# Altium PCB Top.PcbDoc
Units mm, origin at the board's own origin, x right, y up, seen from the top; angles counter-clockwise.
Board outline 40 x 40 mm, 2 copper layers (Top Layer, Bottom Layer); 33 components, 72 nets, 135 pads, 37 vias.
Unrouted connection lines stored in the file: 1.
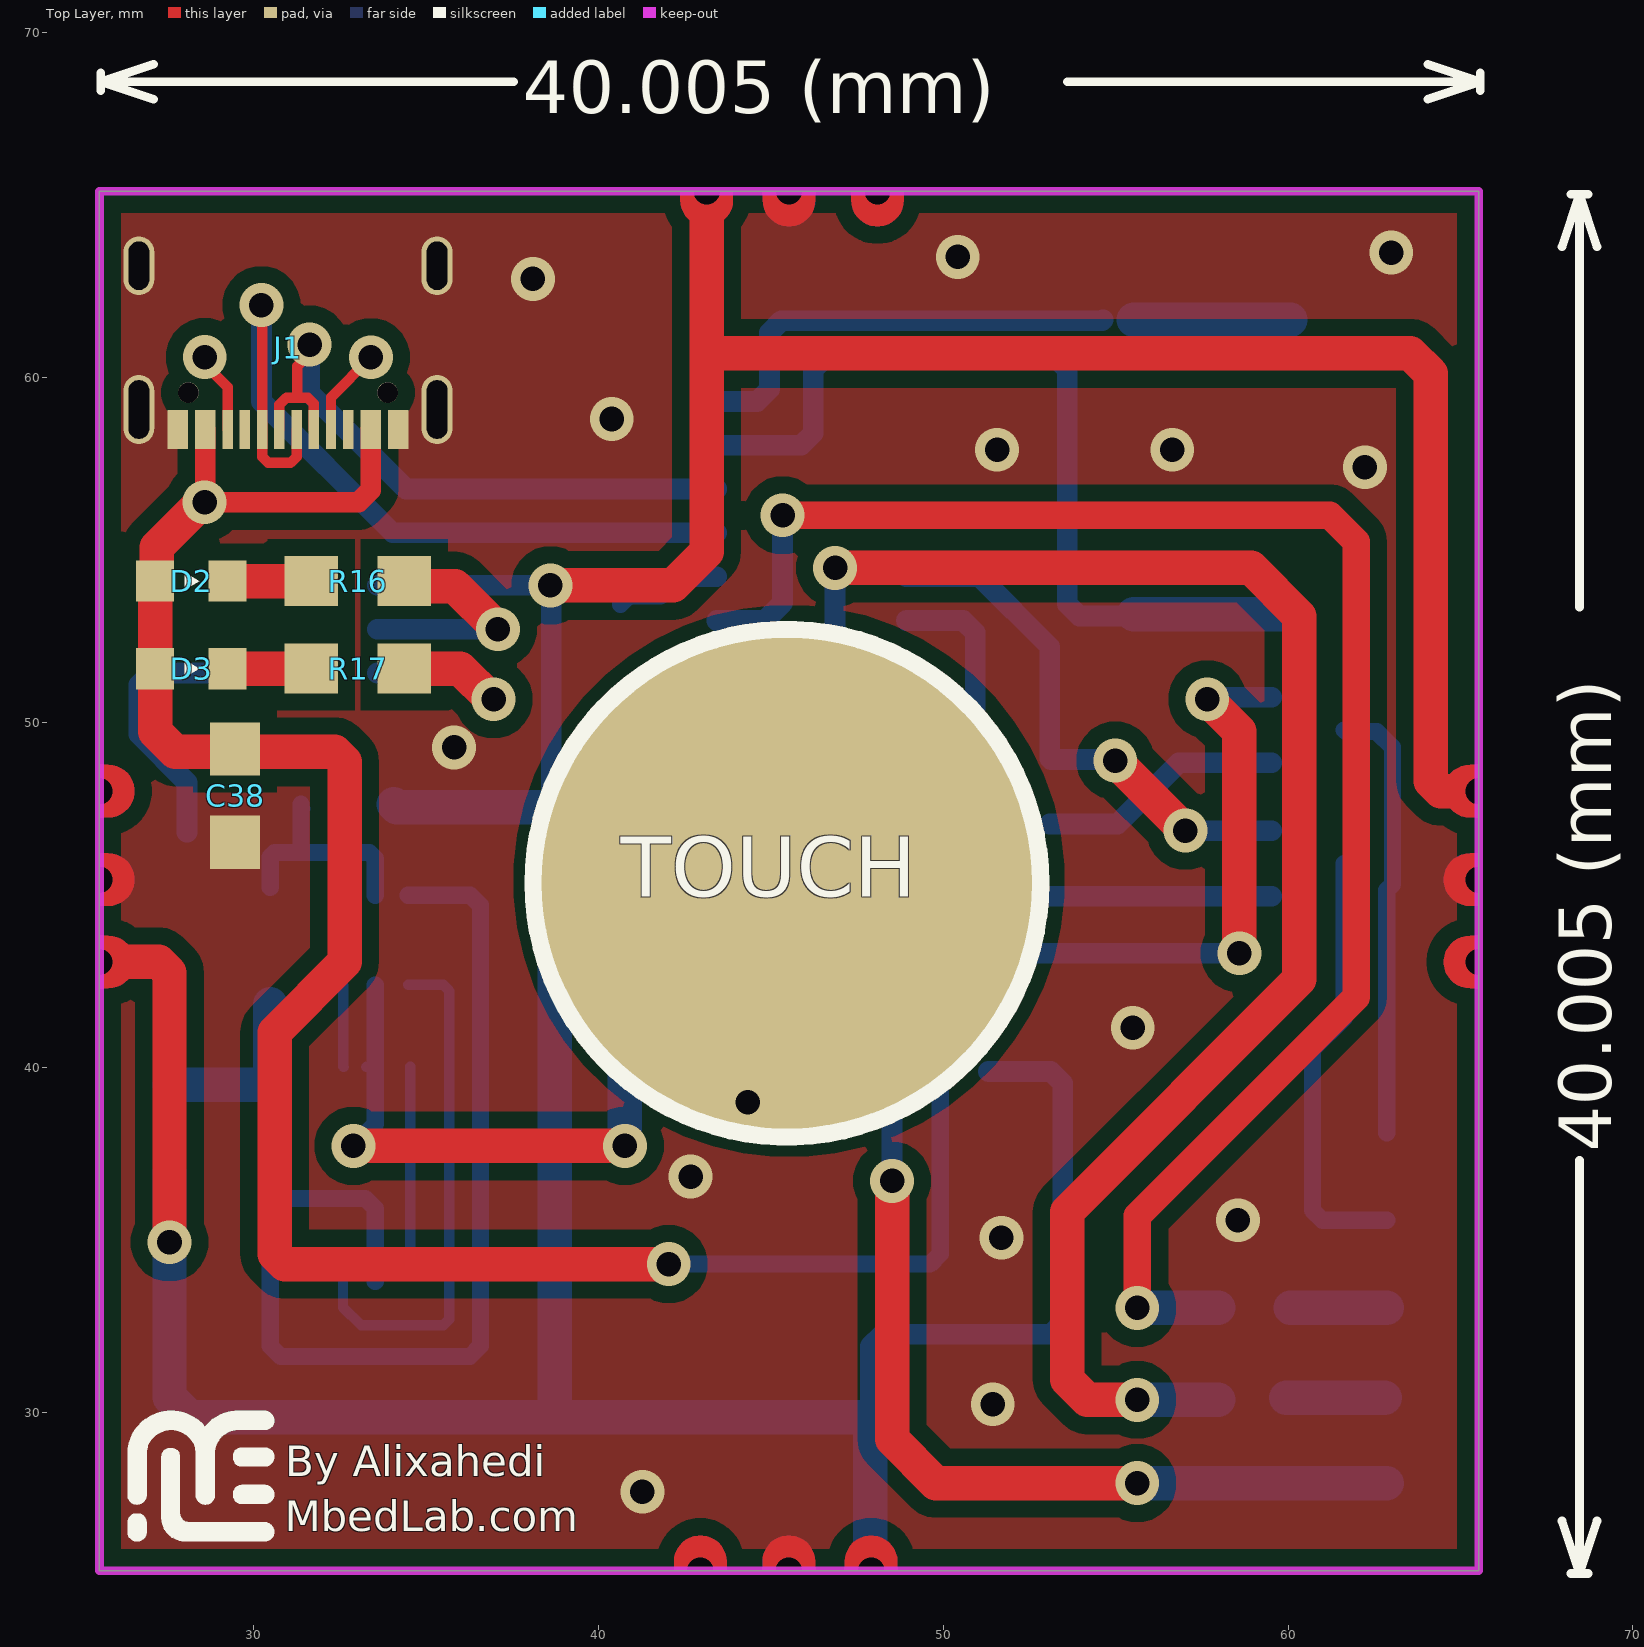
[diagram p0: Top Layer view]
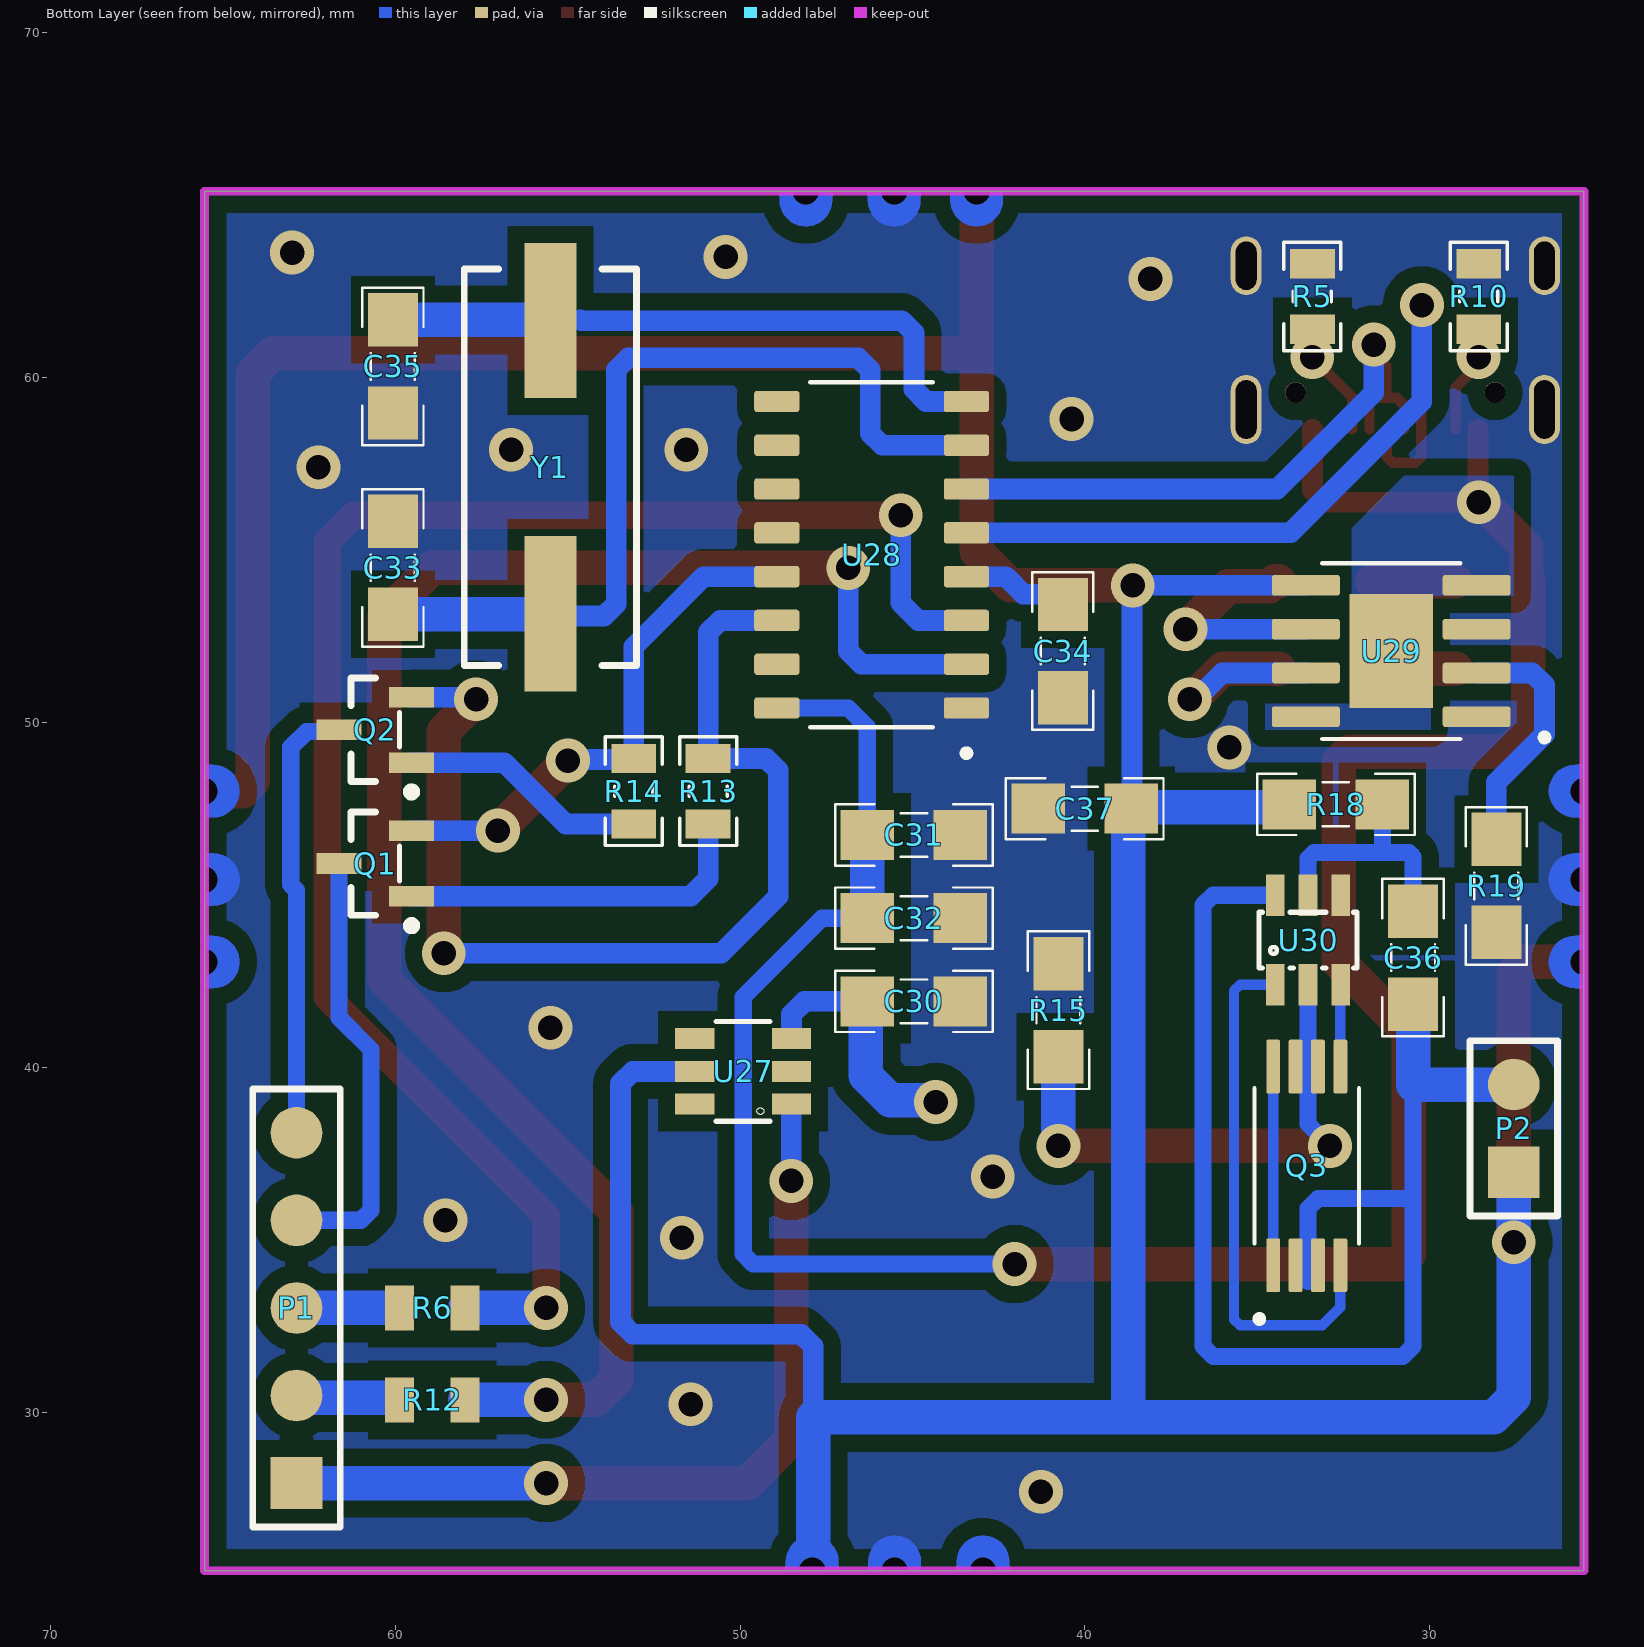
[diagram p1: Bottom Layer view, seen from below]
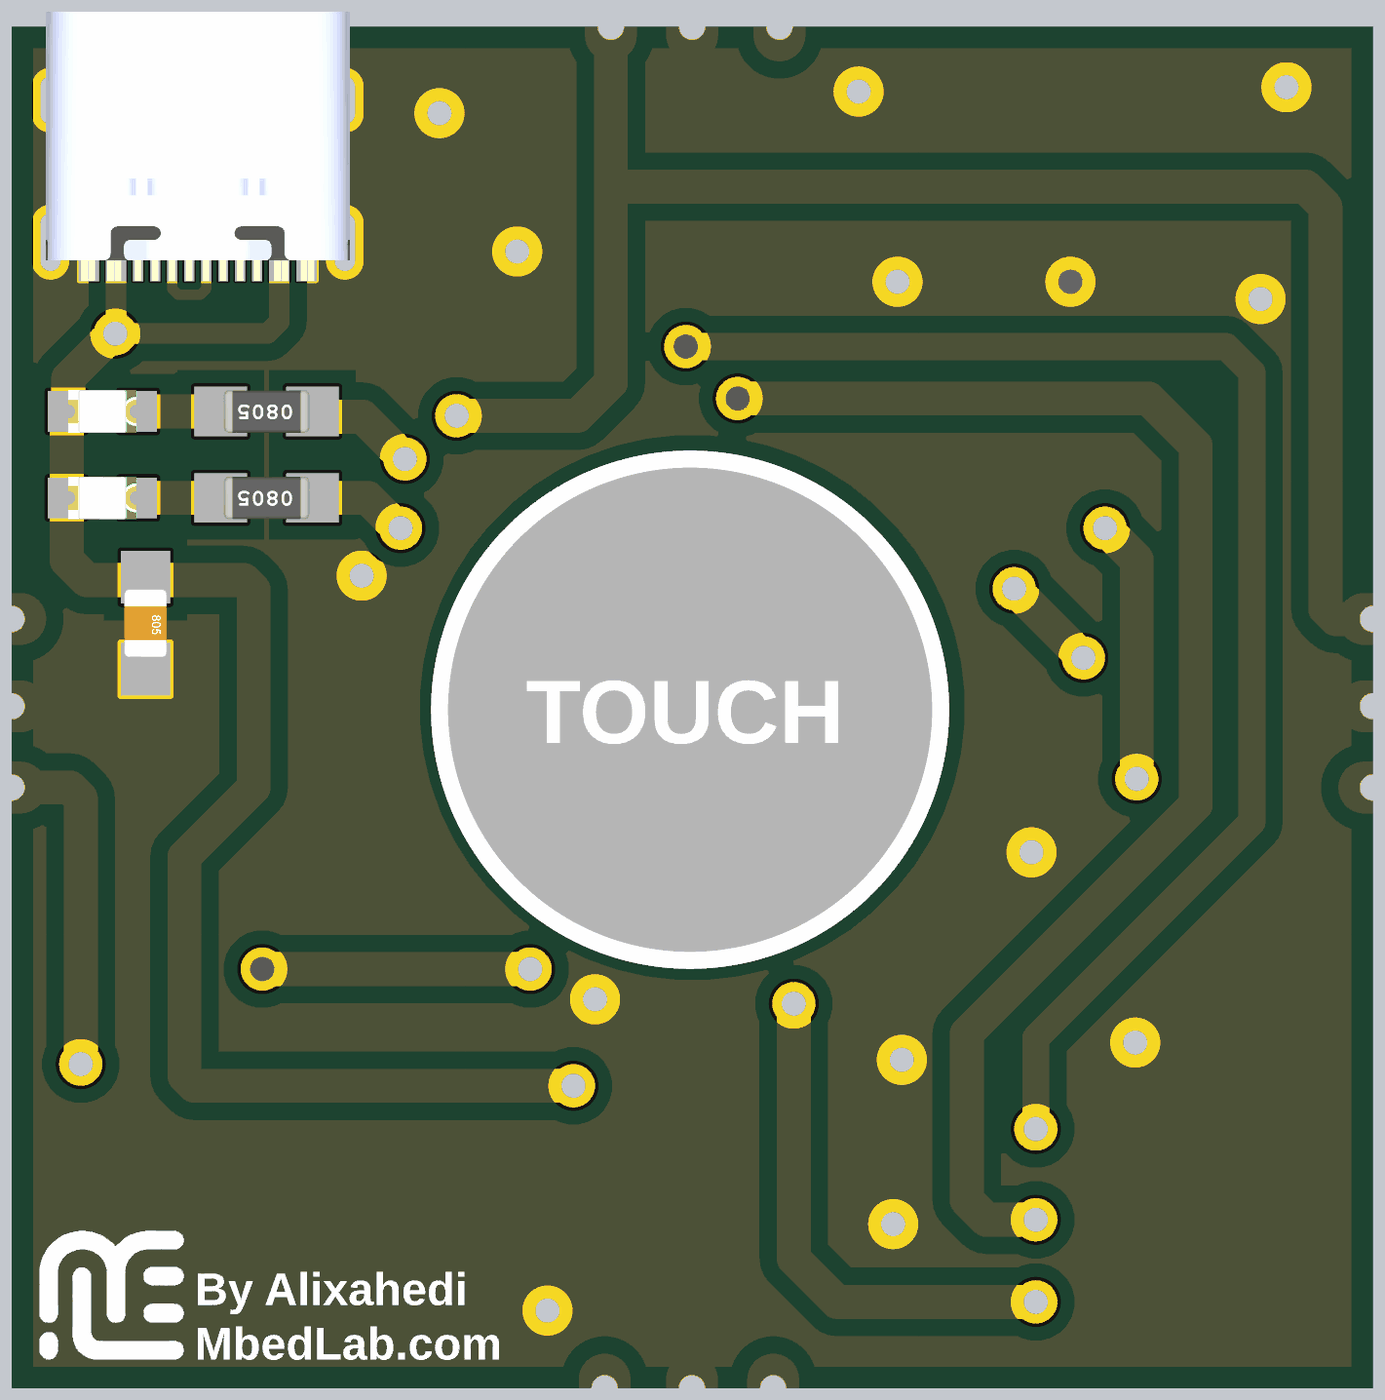
[diagram p2: 3D render of the assembled board from above, using the file's embedded part models]
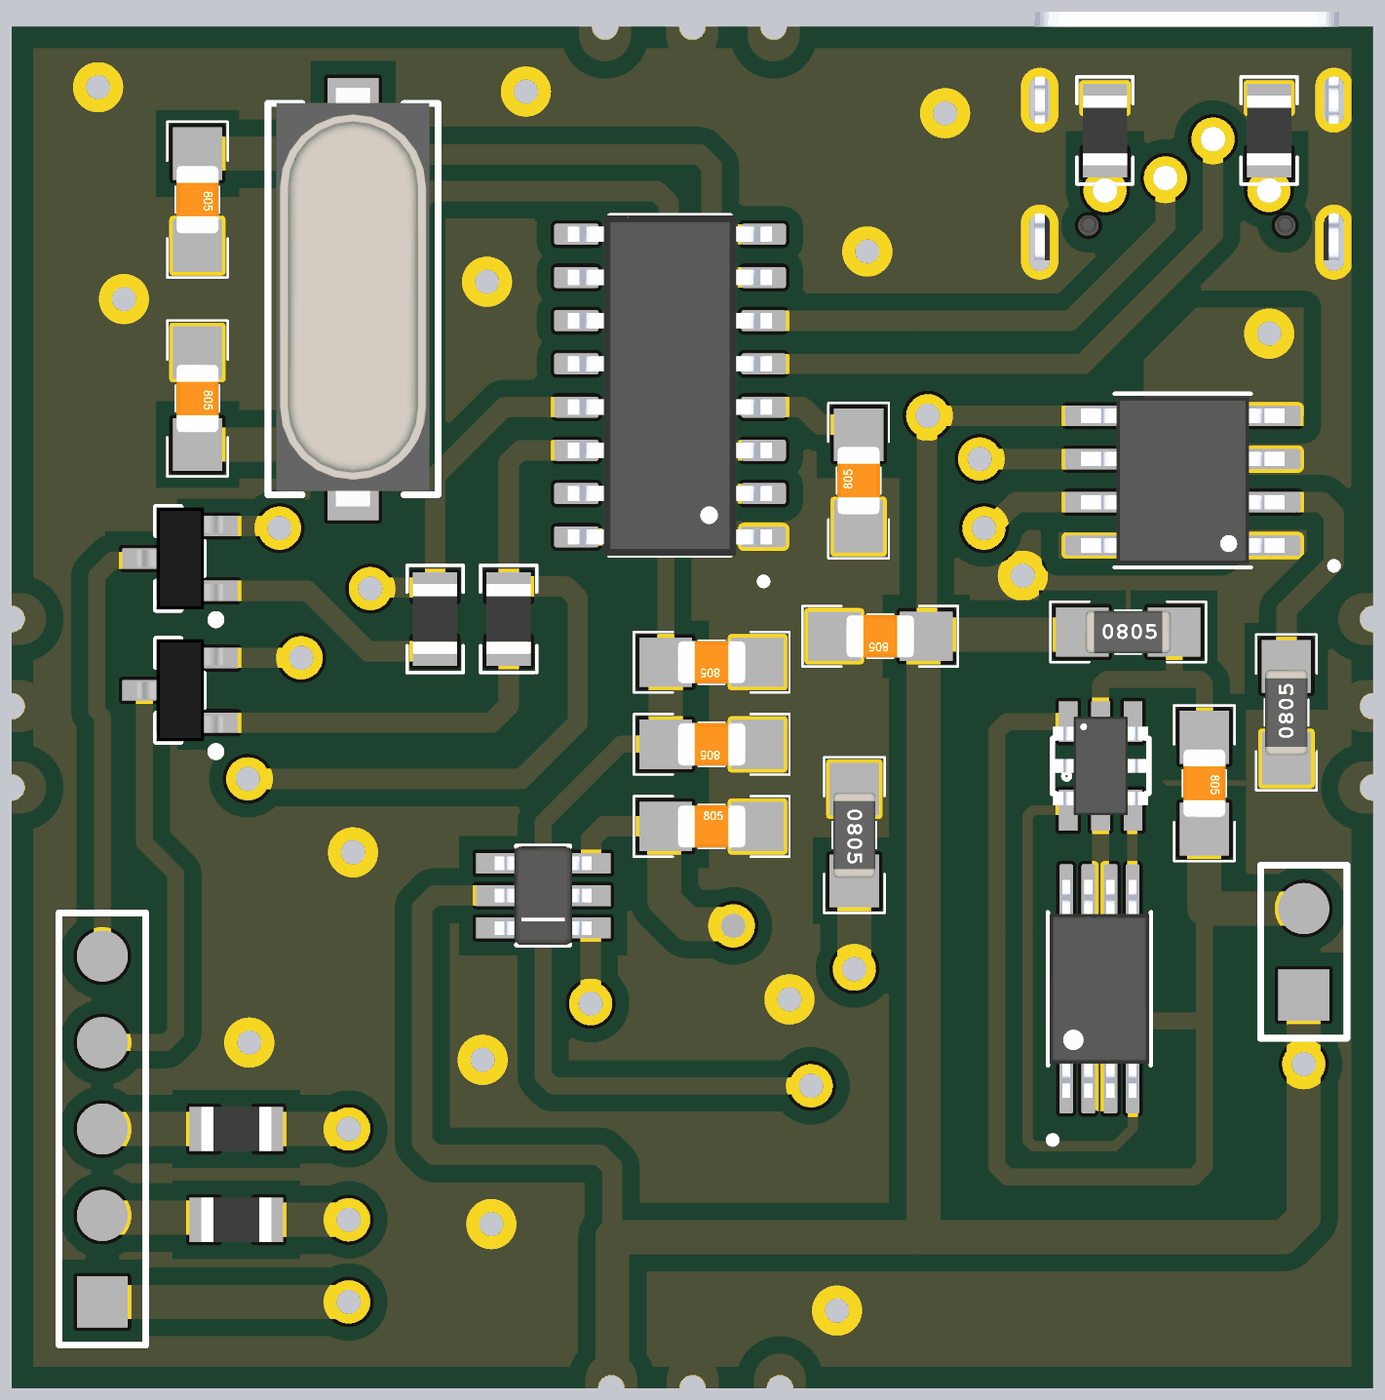
[diagram p3: 3D render of the assembled board from below, using the file's embedded part models]

## Layer stack, top to bottom
Top Solder: solder mask 0.0102, Solder Resist, Dk 3.5
Top Layer: signal copper 0.0356
Dielectric 1: dielectric 0.32, FR-4, Dk 4.8
Bottom Layer: signal copper 0.0356
Bottom Solder: solder mask 0.0102, Solder Resist, Dk 3.5

## Board outline
25.527,25.4 25.527,65.405 65.532,65.405 65.532,25.4

## Design rules (kind name [scope] priority, off if disabled: settings)
Clearance [All] p1: gap=0.5 ignorepadtopadclearanceinfootprint=FALSE
PolygonConnect [All] p1: connectstyle=Direct reliefconductorwidth=0.254 reliefentries=4 polygonreliefangle="90 Angle" airgapwidth=0.254
RoutingVias [All] p1: holewidth=0.711 width=1.27 viastyle="Through Hole" minholewidth=0.711 minwidth=1.27 maxholewidth=0.711 maxwidth=1.27
SolderMaskExpansion [All] p1: expansion=0.102 istentingtop=FALSE
Width [All] p1: maxlimit=1.5 minlimit=0.254 preferedwidth=0.5
30 further rules are at their usual default settings.

## Components (designator, comment, footprint, x,y, rotation, side; value= is the part's Value field where it differs from the comment)
C30 "22pF" CAPC3413X12N 44.958,41.91 r180 bottom
C31 "10uF" CAPC3413X12N 44.958,46.736 r0 bottom
C32 "0.1uF" CAPC3413X12N 44.958,44.323 r0 bottom
C33 "0.1uF" CAPC3413X12N 60.071,54.483 r270 bottom
C34 "0.1uF" CAPC3413X12N 40.64,52.07 r90 bottom
C35 "0.1uF" CAPC3413X12N 60.071,60.325 r270 bottom
C36 "0.1uF" CAPC3413X12N 30.48,43.18 r270 bottom
C37 "10uF" CAPC3413X12N 40.005,47.498 r0 bottom
C38 "0.1uF" CAPC3413X12N 29.464,47.879 r270 top
D2 "LED SMD PACKAGE" LED_SMD_0805 28.194,54.102 r180 top
D3 "LED SMD PACKAGE" LED_SMD_0805 28.194,51.562 r180 top
J1 "TYPE-C-31-M-12" HRO_TYPE-C-31-M-12 30.995,63.246 r180 top
P1 "To Button Board" HDR1X5 62.865,27.94 r90 bottom
P2 "Battery" HDR1X2 27.559,36.957 r90 bottom
Q1 "C945" SOT23_N 60.579,45.908 r0 bottom
Q2 "C945" SOT23_N 60.579,49.784 r0 bottom
Q3 "FS8205A" SOP65P640X120-8N 33.564,37.138 r90 bottom
R5 "5.1K" RES0805 33.401,62.357 r270 bottom
R6 "470" RES0805 58.928,33.02 r0 bottom
R10 "5.1K" RES0805 28.575,62.357 r270 bottom
R12 "470" RES0805 58.928,30.353 r0 bottom
R13 "12K" RES0805 50.927,48.006 r270 bottom
R14 "12K" RES0805 53.086,48.006 r270 bottom
R15 "1K" RESC3413X04N 40.767,41.656 r270 bottom
R16 "1K" RESC3413X04N 33.02,54.102 r180 top
R17 "1K" RESC3413X04N 33.02,51.562 r180 top
R18 "100R" RESC3413X04N 32.719,47.625 r180 bottom
R19 "1.2K" RESC3413X04N 28.067,45.259 r90 bottom
U27 "TTP223-BA6" SOT23-6#1 49.911,39.878 r90 bottom
U28 "CH340G" SOIC127P600X180-16N 46.184,54.864 r0 bottom
U29 "TP4056" SOP127P600X175-9N 31.115,52.07 r0 bottom
U30 "DW01A" SOT23-6#2 33.528,43.688 r180 bottom
Y1 "12 MHz" "Crystal SMD" 55.499,57.404 r270 bottom

## Footprints (in the part's own frame and the unit in brackets; to place one, negate y for a bottom-side part, rotate by r counter-clockwise, add the part's x,y. Pads: shape width x height; smd on the part's side, far side on the other; paste and mask are expansions set on the pad)
CAPC3413X12N [mm] "Chip Capacitor, 2-Leads, Body 3/40x1/30mm, IPC Medium Density-Design:Abbas Basereh"
  rect 1.55x1.45 smd: 1(-1.35,0) 2(1.35,0)
  silkscreen extent -2.29,-0.89 2.29,0.89, body extent -1,-0.63 1,0.62, height 0.78
"Crystal SMD" [mm] "DESIGNER ABBAS BASEREH"
  rect 4.5x1.5 smd: 1(-4.25,0) 2(4.25,0)
  silkscreen extent -5.75,-2.5 5.75,2.5, body extent -6.21,-2.25 6.09,2.25, height 5.18
HDR1X2 [mm] "Connector; Header; 2 Position"
  rect 1.5x1.5 smd: 1(0,0)
  round 1.5 smd: 2(2.54,0)
  silkscreen extent -1.27,-1.27 3.81,1.27
HDR1X5 [mm] "Connector; Header; 5 Position"
  rect 1.5x1.5 smd: 1(0,0)
  round 1.5 smd: 2(2.54,0) 3(5.08,0) 4(7.62,0) 5(10.16,0)
  silkscreen extent -1.27,-1.27 11.43,1.27
HRO_TYPE-C-31-M-12 [mm]
  rect 0.6x1.14 smd mask+0.05: A1_B12(-3.2,4.75) A4_B9(-2.4,4.75) B1_A12(3.2,4.75) B4_A9(2.4,4.75)
  rect 0.3x1.14 smd mask+0.05: A5(-1.25,4.75) A6(-0.25,4.75) A7(0.25,4.75) A8(1.25,4.75) B5(1.75,4.75) B6(0.75,4.75) B7(-0.75,4.75) B8(-1.75,4.75)
  oval 0.9x2 hole 0.6 slot 1.7 at 90 deg: S1(-4.325,4.17) S2(4.325,4.17)
  oval 0.9x1.7 hole 0.6 slot 1.4 at 90 deg: S3(-4.325,0) S4(4.325,0)
  round 0.6 hole 0.6 unplated: ""(-2.89,3.68) ""(2.89,3.68)
  body extent -4.47,-2.6 4.47,5.31, height 3.31
LED_SMD_0805 [mm] "SMD Mono-color Chip LED, body 2.0x1.25mm"
  rect 1.1x1.2 smd: 1(-1.05,0) 2(1.05,0)
  silkscreen extent -0.23,-0.25 0.2,0.25, body extent -1,-0.62 1,0.63, height 0.7
RES0805 [mm] "Chip Resistor, 2-Leads, Body 2/00x1/25mm, IPC Medium Density DESIGNER:ABBAS BASEREH"
  rect 0.85x1.3 smd: 1(-0.95,0) 2(0.95,0)
  silkscreen extent -1.58,-0.82 1.58,0.82, body extent -1.02,-0.65 1.02,0.65, height 0.5
RESC3413X04N [mm] "Chip Resistor, 2-Leads, Body 3/40x1/30mm, IPC Medium Density-Design:Abbas Basereh"
  rect 1.55x1.45 smd: 1(-1.35,0) 2(1.35,0)
  silkscreen extent -2.29,-0.89 2.29,0.89, body extent -1.25,-0.62 1.25,0.62, height 0.79
SOIC127P600X180-16N [mm]
  rrect25% 1.31x0.62 smd: 1(-2.75,4.445) 2(-2.75,3.175) 3(-2.75,1.905) 4(-2.75,0.635) 5(-2.75,-0.635) 6(-2.75,-1.905) 7(-2.75,-3.175) 8(-2.75,-4.445) 9(2.75,-4.445) 10(2.75,-3.175) 11(2.75,-1.905) 12(2.75,-0.635) 13(2.75,0.635) 14(2.75,1.905) 15(2.75,3.175) 16(2.75,4.445)
  silkscreen extent -2.85,-5 1.78,5.85, body extent -3,-5 3,5, height 1.8
SOP65P640X120-8N [mm]
  rrect25% 1.56x0.4 smd: 1(-2.88,0.975) 2(-2.88,0.325) 3(-2.88,-0.325) 4(-2.88,-0.975) 5(2.88,-0.975) 6(2.88,-0.325) 7(2.88,0.325) 8(2.88,0.975)
  silkscreen extent -4.54,-1.52 2.25,1.52, body extent -3.2,-1.47 3.2,1.47, height 1.2
SOP127P600X175-9N [mm]
  rrect25% 1.97x0.6 smd: 1(-2.475,1.905) 2(-2.475,0.635) 3(-2.475,-0.635) 4(-2.475,-1.905) 5(2.475,-1.905) 6(2.475,-0.635) 7(2.475,0.635) 8(2.475,1.905)
  rect 2.413x3.302 smd paste-3: 9(0,0)
  silkscreen extent -4.54,-2.55 2,2.6, body extent -3,-2.45 3,2.45, height 1.75
SOT23-6#1 [mil]
  rect 24x45 smd: 1(-37.4,-55.28) 2(0,-55.28) 3(37.4,-55.28) 4(37.4,55.28) 5(0,55.28) 6(-37.4,55.28)
  silkscreen extent -57,-31 57,31, body extent -57,-56 57,56, height 50
SOT23-6#2 [mil]
  rect 21.65x47.24 smd: 1(-37.4,-51.18) 2(0,-51.18) 3(37.4,-51.18) 4(37.4,51.18) 5(0,51.18) 6(-37.4,51.18)
  silkscreen extent -56,-32 56,32, body extent -55,-57 55,57, height 57
SOT23_N [mm] "SOT23, 3-Leads, Body 2.9x1.3mm, Pitch 0.95mm, Lead Span 2.3mm, IPC Medium Density"
  rect 1.3x0.6 smd: 1(-1.05,0.95) 2(-1.05,-0.95) 3(1.05,0)
  silkscreen extent -1.17,-1.5 0.7,1.92, body extent -1.27,-1.5 1.27,1.5, height 1.1

## Part data
C30 C31 C32 C33 C34 C35 C36 C37 C38: library part "CAP SMD 0805", "CAP 0805", Data=16-12-2016, Desc.="CAP SMD 0805", Designer="Abbas Basereh"
D2 D3: "SMD Mono-color Chip LED Waterclear", Forward Voltage="3.2 V", Part Number=150080BS75000, Peak Wavelength="465 nm", Published Date="Jan 2017", Publisher="Ali Hafizi"
J1: "USB Connectors 24 Receptacle 1 8.94*7.3mm RoHS", Package=Package, Availability="Not in stock", Check_prices=https://www.snapeda.com/parts/TYPE-C-31-M-12/HRO+Electronics+Co.%252C+Ltd./view-part/?ref=eda, MF="HRO Electronics Co., Ltd.", MP=TYPE-C-31-M-12, Price=None, SnapEDA_Link=https://www.snapeda.com/parts/TYPE-C-31-M-12/HRO+Electronics+Co.%252C+Ltd./view-part/?ref=snap
P1: library part "Header 5", "Header, 5-Pin", LatestRevisionDate=17-Jul-2002, LatestRevisionNote="Re-released for DXP Platform.", Publisher="Altium Limited"
P2: library part "Header 2", "Header, 2-Pin", LatestRevisionDate=17-Jul-2002, LatestRevisionNote="Re-released for DXP Platform.", Publisher="Altium Limited"
Q1 Q2: "NPN Silicon Epitaxial Planar Transistor", ComponentLink1Description="Manufacturer Link", ComponentLink1URL=http://www.taitroncomponents.com/, ComponentLink2Description=Datasheet, ComponentLink2URL=http://www.taitroncomponents.com/, DatasheetVersion=2017, LatestRevisionDate=2017, LatestRevisionNote="IPC-7351 Footprint Added.", PackageDescription="3-Pin SOT-23 Package 0.95 mm Pitch, 2.3 mm Lead Span", PackageReference=SOT23, PackageVersion=2017-2-8, Published=2017-2-8, Publisher="Abbas Basereh"
Q3: "N/A", Package=Package, Availability="Not in stock", Check_prices=https://www.snapeda.com/parts/FS8205A/Fortune+Semiconductor/view-part/?ref=eda, MF="Fortune Semiconductor", MP=FS8205A, Price=None, SnapEDA_Link=https://www.snapeda.com/parts/FS8205A/Fortune+Semiconductor/view-part/?ref=snap
R5 R6 R10 R12 R13 R14: library part "RES SMD PACKAGE", "TOTAL SMD RESISTOR PACK", Data=2017-3-10, Desc.="RES SMD PAKAGES", Designer="Abbas Basereh"
R15 R16 R17 R18 R19: library part "RES 0805 0.125W", "RES 0805", Data=16-12-2016, Desc.="RES SMD 0805", Designer="Abbas Basereh"
U27: "<b>DÃ©tecteur</b> de Touches Tactiles IC<p> Doc constructeur <a href=\"http://geii/magasin/pdf/TTP223-BA6.pdf\" title=\"Enlarge picture\"> <img src=\"http://geii/magasin/images/pdf.jpg\"></a><p> <b>GEII/IUT ANGERS</b>", Package=None, Availability="Not in stock", Check_prices=https://www.snapeda.com/parts/TTP223-BA6/TONTEK/view-part/?ref=eda, MF=tontek, MP=TTP223-BA6, Price=None, SnapEDA_Link=https://www.snapeda.com/parts/TTP223-BA6/TONTEK/view-part/?ref=snap
U28: "USB Interface Integrated Circuit", Package=None, Availability="Not in stock", Check_prices=https://www.snapeda.com/parts/Ch340G/WCH/view-part/?ref=eda, MF=WCH, MP=Ch340G, Price=None, SnapEDA_Link=https://www.snapeda.com/parts/Ch340G/WCH/view-part/?ref=snap
U29: "Complete single cell Li-Ion battery with a constant current / constant voltage linear charger", Package=Package, Availability="Not in stock", Check_prices=https://www.snapeda.com/parts/TP4056/NanJing+Top+Power+ASIC+Corp./view-part/?ref=eda, MF="NanJing Top Power ASIC Corp.", MP=TP4056, Price=None, SnapEDA_Link=https://www.snapeda.com/parts/TP4056/NanJing+Top+Power+ASIC+Corp./view-part/?ref=snap
U30: "One Cell Lithium-ion/Polymer Battery Protection IC", Package="SOT-23-6 Fortune Semiconductor", Check_prices=https://www.snapeda.com/parts/DW01A/Fortune+Semiconductor/view-part/?ref=eda, MF="Fortune Semiconductor", MP=DW01A, SnapEDA_Link=https://www.snapeda.com/parts/DW01A/Fortune+Semiconductor/view-part/?ref=snap
Y1: library part XTAL, "XTAL Crystal", ComponentLink1Description=Datasheet, ComponentLink2Description=Reference, Design Date=2017-1-3, Designer="ABBAS BASEREH", Mounting Technology="Surface Mount\Through-Hole", Status=Unreleased

## Free pads (board coordinates)
  round 0 hole 0.762: 4(25.527,43.053) 4(25.527,45.441) 4(25.527,48.006) 4(42.955,25.402) 4(43.139,65.405) 4(45.52,25.402) 4(45.527,65.405) 4(47.908,25.402) 4(48.092,65.405) 4(65.532,43.053) 4(65.532,45.441) 4(65.532,48.006)
  round 15 smd mask+0.102: TP(45.529,45.402)

## Via types
v1: diameter 1.27, hole 0.711, Top Layer to Bottom Layer, 37 vias

## Nets (pads, with @x,y where several pads share a name; then routed paths per layer and width w, separated by ;. In a path a pad name is that pad's centre, name@x,y a point inside that pad or via, vN(x,y) a via of type N, cw(c..) or ccw(c..) an arc to the next point about the centre after c; other vN are vias at no path point)
+3.3: 
+5: C37.1 P2.1 pad.4@25.527,43.053 pad.4@43.139,65.405 pad.4@47.908,25.402 pad.4@65.532,48.006 R18.1 U27.5 U29.5 | length 139.3
  Top Layer w1: 26.354,43.053 27.243,43.053 27.559,42.737 v1(27.559,34.925) ; v1(38.608,53.975) 42.164,53.975 43.139,54.95 43.139,60.706 ; 43.139,64.643 43.139,60.706 ; 64.897,48.006 64.43,48.006 64.135,48.301 64.135,60.12 63.549,60.706 43.139,60.706
  Bottom Layer w0.6: U29.5 v1(38.608,53.975) 38.632,53.951 38.632,47.65 C37.1@38.735,47.547 ; 47.879,29.845 47.879,31.907 48.23,32.258 53.116,32.258 53.467,32.609 53.467,39.527 53.116,39.878 U27.5
  Bottom Layer w1: P2.1 v1(27.559,34.925) 27.559,30.431 28.145,29.845 38.735,29.845 47.879,29.845 47.879,26.162 ; R18.1 34.147,47.547 38.735,47.547 38.735,30.099
Battery-: C36.2 P2.2 Q3.2 Q3.3 U30.6 | length 39.3
  Bottom Layer w0.5: 30.48,39.497 30.48,31.916 30.784,31.612 36.272,31.612 36.576,31.916 36.576,44.695 36.283,44.988 U30.6 ; 30.607,36.195 33.235,36.195 33.528,35.902 33.528,33.782
  Bottom Layer w1: P2.2 30.48,39.497 C36.2
DN: J1.A7 J1.B7 U28.6 | length 18.7
  Top Layer w0.3: J1.A7 30.745,59.211 30.95,59.416 31.26,59.416 ; v1(31.623,60.96) 31.623,60.698 31.26,60.334 31.26,59.416 ; J1.B7 31.745,58.916 31.745,59.24 31.569,59.416 31.26,59.416
  Bottom Layer w0.6: v1(31.623,60.96) 31.623,59.563 34.417,56.769 U28.6
DP: J1.A6 J1.B6 U28.5 | length 23.9
  Top Layer w0.3: v1(30.226,62.103) 30.245,62.084 J1.B6 30.245,57.707 30.421,57.531 31.069,57.531 31.245,57.707 31.245,57.988 J1.A6
  Bottom Layer w0.6: v1(30.226,62.103) 30.226,59.309 34.036,55.499 U28.5
EN: 
GND: C30.2 C31.1 C32.1 C33.1 C34.1 C35.2 C37.2 C38.2 J1.A1_B12 J1.B1_A12 J1.S1 J1.S2 J1.S3 J1.S4 pad.4@25.527,45.441 pad.4@45.52,25.402 pad.4@45.527,65.405 pad.4@65.532,45.441 R5.1 R10.1 R15.1 R19.1 U27.2 U28.1 U29.1 U29.3
  other v1: 41.275,27.686 51.435,30.226 51.689,35.052 58.547,35.56 42.672,36.83 55.499,41.148 35.814,49.276 62.23,57.404 51.562,57.912 56.642,57.912 40.386,58.801 38.1,62.865 50.419,63.5 62.992,63.627
GPIO0: P1.4 Q1.3 | length 12.7
  Bottom Layer w0.5: Q1.3 61.629,41.436 60.706,40.513 60.706,35.853 60.999,35.56 P1.4
GPIO2: 
GPIO4: 
GPIO5: 
GPIO9: 
GPIO10: 
GPIO12: 
GPIO13: 
GPIO14: 
GPIO15: 
GPIO16: 
NetC30_1: C30.1 pad.TP U27.3 | length 7.7
  Bottom Layer w0.3: C30.1 C30.1@46.355,41.863 ; 46.355,40.894 46.421,40.828
  Bottom Layer w0.6: C30.1 48.133,41.91 48.507,41.536 U27.3 U27.3@48.502,40.833
  Bottom Layer w1: v1(44.323,38.989) 44.375,39.041 45.645,39.041 46.355,39.751 46.355,40.894 C30.1@46.355,41.863
NetC33_2: C33.2 U28.7 Y1.2 | length 25.9
  Bottom Layer w0.6: U28.7 45.877,58.039 46.228,58.39 46.228,60.228 46.579,60.579 53.243,60.579 53.594,60.228 53.594,53.437 53.945,53.086 55.431,53.086 Y1.2 Y1.2@55.52,53.133
  Bottom Layer w1: Y1.2@55.52,53.133 C33.2
NetC34_2: C34.2 U28.4 | length 3.1
  Bottom Layer w0.5: C34.2 C34.2@40.941,53.721
  Bottom Layer w0.6: C34.2@40.941,53.721 41.783,53.721 42.291,54.229 U28.4
NetC35_1: C35.1 U28.8 Y1.1 | length 17.7
  Bottom Layer w0.6: U28.8 44.607,59.309 44.958,59.66 44.958,61.303 45.309,61.654 54.61,61.654 54.631,61.675
  Bottom Layer w1: Y1.1@55.52,61.675 C35.1
NetC36_1: C36.1 R18.2 U30.5 | length 6.7
  Bottom Layer w0.3: R18.2 R18.2@31.496,47.498
  Bottom Layer w0.5: C36.1@30.48,45.212 30.48,46.101 30.607,46.228 31.369,46.228 ; R18.2 31.369,46.228 ; U30.5 33.528,46.052 33.352,46.228 31.369,46.228
NetD2_1: D2.1 R16.2 | length 2.4
  Top Layer w1: D2.1 R16.2
NetD3_1: D3.1 R17.2 | length 2.4
  Top Layer w1: D3.1 R17.2
NetJ1_A5: J1.A5 R5.2 | length 2.6
  Top Layer w0.3: J1.A5 32.245,59.436 v1(33.402,60.593)
NetJ1_B5: J1.B5 R10.2 | length 2.4
  Top Layer w0.3: v1(28.583,60.596) 28.583,60.386 29.245,59.723 J1.B5
NetQ1_1: Q1.1 R13.2 | length 10.4
  Bottom Layer w0.6: R13.2 50.927,45.466 51.435,44.958 Q1.1
NetQ1_2: Q1.2 R14.1 U28.13 | length 15.5
  Top Layer w1: v1(54.991,48.895) v1(57.023,46.863)
  Bottom Layer w0.6: U28.13 51.054,54.229 53.086,52.197 R14.1 53.117,48.926 54.96,48.926 v1(54.991,48.895) ; v1(57.023,46.863) Q1.2@59.529,46.863
NetQ2_1: Q2.1 R14.2 | length 7.2
  Bottom Layer w0.6: R14.2 55.057,47.056 56.835,48.834 Q2.1
NetQ2_2: Q2.2 R13.1 U28.14 | length 31.6
  Top Layer w1: v1@57.71,50.621 58.591,49.74 v1(58.591,43.307)
  Bottom Layer w0.6: U28.14 50.576,52.959 50.927,52.608 R13.1 49.246,48.956 48.895,48.605 48.895,44.958 50.546,43.307 v1(58.591,43.307) ; v1(57.658,50.673) 57.719,50.734 Q2.2
NetQ3_1: Q3.1 Q3.8 | length 5.8
  Bottom Layer w0.3: Q3.1 Q3.8
NetQ3_4: Q3.4 U30.1 | length 15.4
  Bottom Layer w0.3: Q3.4 32.589,33.038 33.115,32.512 35.5,32.512 35.676,32.688 35.676,42.212 35.5,42.388 U30.1
NetQ3_5: Q3.5 U30.3 | length 2.4
  Bottom Layer w0.3: U30.3 32.594,42.372 32.594,40.02 Q3.5@32.609,40.005
NetQ3_6: Q3.6 Q3.7 R15.2 U30.2 | length 15.4
  Top Layer w1: v1(32.893,37.719) v1(40.767,37.719)
  Bottom Layer w0.3: Q3.6@33.259,40.005 Q3.6@33.274,40.02
  Bottom Layer w0.5: v1(32.893,37.719) 33.528,38.354 U30.2
  Bottom Layer w1: v1(40.767,37.719) R15.2
NetR6_1: R6.1 U28.3 | length 48.8
  Top Layer w0.8: v1(45.339,56.007) 61.214,56.007 61.976,55.245 61.976,42.037 55.626,35.687 v1(55.626,33.02)
  Bottom Layer w0.6: U28.3 44.831,52.959 45.339,53.467 v1(45.339,56.007)
  Bottom Layer w1: v1(55.626,33.02) R6.1
NetR7_2: 
NetR11_1: 
NetR12_1: R12.1 U28.2 | length 49.6
  Top Layer w1: v1(46.863,54.483) 58.928,54.483 60.325,53.086 60.325,42.545 53.594,35.814 53.594,30.939 54.18,30.353 v1(55.626,30.353)
  Bottom Layer w0.6: U28.2 46.482,51.689 46.863,52.07 v1(46.863,54.483)
  Bottom Layer w1: v1(55.626,30.353) R12.1
NetR16_1: R16.1 U29.6 | length 6.7
  Top Layer w1: R16.1 34.493,54.102 34.645,53.95 35.839,53.95 v1@37.032,52.757
  Bottom Layer w0.6: U29.6 v1(37.084,52.705)
NetR17_1: R17.1 U29.7 | length 6.6
  Top Layer w1: R17.1 35.995,51.562 36.884,50.673 v1(36.957,50.673)
  Bottom Layer w0.6: U29.7 36.014,51.435 36.776,50.673 v1(36.957,50.673)
NetR19_2: R19.2 U29.2 | length 7
  Bottom Layer w0.6: R19.2@28.067,46.816 28.067,48.26 26.67,49.657 26.67,51.084 27.021,51.435 U29.2
NetU1_2: 
NetU2_2: 
NetU3_2: 
NetU4_2: 
NetU5_2: 
NetU6_2: 
NetU7_2: 
NetU8_2: 
NetU9_2: 
NetU10_2: 
NetU11_2: 
NetU12_2: 
NetU13_2: 
NetU14_2: 
NetU15_2: 
NetU16_2: 
NetU17_2: 
NetU18_2: 
NetU19_2: 
NetU20_2: 
NetU21_2: 
NetU22_2: 
NetU23_2: 
NetU24_2: 
nRST: P1.5 Q2.3 | length 12.9
  Bottom Layer w0.5: Q2.3 61.679,49.734 62.572,49.734 63.029,49.277 63.029,45.297 62.865,45.133 P1.5
OUTPUT1: 
RXD: P1.2 R12.2 | length 2.9
  Bottom Layer w1: R12.2@59.941,30.416 P1.2@62.801,30.416
Touch: P1.1 U27.1 | length 24.6
  Top Layer w1: v1(48.514,36.703) 48.514,29.21 49.784,27.94 v1(55.626,27.94)
  Bottom Layer w0.3: U27.1 U27.1@48.514,38.921
  Bottom Layer w0.6: v1(48.514,36.703) U27.1@48.514,38.921
  Bottom Layer w1: v1(55.626,27.94) P1.1
TXD: P1.3 R6.2 | length 2.8
  Bottom Layer w1: R6.2@60.071,33.02 P1.3
VBUS: C31.2 C32.2 C38.1 D2.2 D3.2 J1.A4_B9 J1.B4_A9 U28.16 U29.4 U29.8 U29.9 | length 76.9
  Top Layer w0.6: J1.B4_A9 28.595,56.408 v1(28.575,56.388) 33.044,56.388 33.395,56.739 33.395,58.05 J1.A4_B9
  Top Layer w1: v1@28.45,56.336 27.194,55.08 27.194,54.152 D2.2 D3.2 27.144,49.735 27.73,49.149 29.464,49.149 32.346,49.149 32.639,48.856 32.639,43.053 30.607,41.021 30.607,34.583 30.9,34.29 v1(42.037,34.29)
  Bottom Layer w0.5: v1(42.037,34.29) 49.618,34.29 49.911,34.583 49.911,42.037 47.625,44.323 C32.2 ; C31.2 46.308,49.864 46.863,50.419 U28.16
  Bottom Layer w1: C32.2 C31.2
pads on no net: J1. J1.A8 J1.B8 U27.4 U27.6 U28.9 U28.10 U28.11 U28.12 U28.15 U30.4

## Polygon pours and split planes (outlines as drawn)
GND on Bottom Layer "POL12" (solid, remove dead copper, pour order 2): 26.035,64.897 65.024,64.897 65.024,25.908 26.035,25.908
VBUS on Bottom Layer "POL12" (solid, pour order 1): 29.909,53.671 29.972,53.607 29.972,49.784 34.768,49.784 34.768,50.546 35.433,50.546 32.258,50.546 32.258,53.671
VBUS on Bottom Layer "POL12" (solid, pour order 0): 32.258,53.671 27.559,53.671 27.559,57.15 30.734,57.15 32.258,55.626
GND on Top Layer "POL12" (solid, remove dead copper, pour order 3): 26.035,64.897 65.024,64.897 65.024,25.908 26.035,25.908

## Keep-outs
Keep-Out Layer:
  the board outline again, w0.254

## Other copper
Top Layer:
  region net GND: 46.282,25.656 ccw(c45.52,25.656) 44.758,25.656 44.758,25.402 46.282,25.402
  region: 47.33,65.151 ccw(c48.092,65.151) 48.854,65.151 48.854,65.405 47.33,65.405
  region net GND: 44.765,65.151 ccw(c45.527,65.151) 46.289,65.151 46.289,65.405 44.765,65.405
  region net GND: 65.278,46.203 ccw(c65.278,45.441) 65.278,44.679 65.532,44.679 65.532,46.203
  region: 65.278,43.815 ccw(c65.278,43.053) 65.278,42.291 65.532,42.291 65.532,43.815
  region net GND: 25.781,44.679 ccw(c25.781,45.441) 25.781,46.203 25.527,46.203 25.527,44.679
  region net +5: 25.781,42.291 ccw(c25.781,43.053) 25.781,43.815 25.527,43.815 25.527,42.291
  region: 25.781,47.244 ccw(c25.781,48.006) 25.781,48.768 25.527,48.768 25.527,47.244
  region net +5: 65.278,48.768 ccw(c65.278,48.006) 65.278,47.244 65.532,47.244 65.532,48.768
  region net +5: 42.377,65.151 ccw(c43.139,65.151) 43.901,65.151 43.901,65.405 42.377,65.405
  region: 43.717,25.656 ccw(c42.955,25.656) 42.193,25.656 42.193,25.402 43.717,25.402
  region net +5: 48.67,25.656 ccw(c47.908,25.656) 47.146,25.656 47.146,25.402 48.67,25.402
Bottom Layer:
  region net GND: 44.768,65.149 ccw(c45.53,65.149) 46.292,65.149 46.292,65.403 44.768,65.403
  region: 47.33,65.151 ccw(c48.092,65.151) 48.854,65.151 48.854,65.405 47.33,65.405
  region: 65.278,43.815 ccw(c65.278,43.053) 65.278,42.291 65.532,42.291 65.532,43.815
  region net GND: 65.276,46.206 ccw(c65.276,45.444) 65.276,44.682 65.53,44.682 65.53,46.206
  region net GND: 25.783,44.682 ccw(c25.783,45.444) 25.783,46.206 25.529,46.206 25.529,44.682
  region net +5: 25.781,42.291 ccw(c25.781,43.053) 25.781,43.815 25.527,43.815 25.527,42.291
  region: 25.781,47.244 ccw(c25.781,48.006) 25.781,48.768 25.527,48.768 25.527,47.244
  region net +5: 42.377,65.151 ccw(c43.139,65.151) 43.901,65.151 43.901,65.405 42.377,65.405
  region net +5: 65.278,48.768 ccw(c65.278,48.006) 65.278,47.244 65.532,47.244 65.532,48.768
  region net +5: 48.67,25.656 ccw(c47.908,25.656) 47.146,25.656 47.146,25.402 48.67,25.402
  region net GND: 46.279,25.658 ccw(c45.517,25.658) 44.755,25.658 44.755,25.404 46.279,25.404
  region: 43.717,25.656 ccw(c42.955,25.656) 42.193,25.656 42.193,25.402 43.717,25.402

## Silkscreen, mask and mechanical layers (free items; w line width, h text height)
Top Overlay:
  drawing of 22 lines, arcs and shapes, not listed
  text "40.005 (mm)" at 37.8,67.666 h1.52
  text "TOUCH" at 40.64,44.359 h3
  text "40.005 (mm)" at 69.367,37.546 h1.52 r90
  text "By Alixahedi" at 30.916,27.85 h1.52
  text "MbedLab.com" at 30.905,26.249 h1.52

## Text inside footprints (layer, text, board x,y; h text height)
U27: Mechanical 13 "1" at 48.006,37.973 h0.81 r270